# Altium PCB PCB-15_19_prototyp1.PcbDoc (part 2 of 4)
Units mm, origin at the board's own origin, x right, y up, seen from the top; angles counter-clockwise.
Board outline 190 x 150 mm, 8 copper layers (Top Layer, VCC3V3, Layer 2, layer 3, layer 4, layer 5, GND, Bottom Layer), stack 1.682 mm thick; 129 components, 396 nets, 1206 pads, 615 vias.
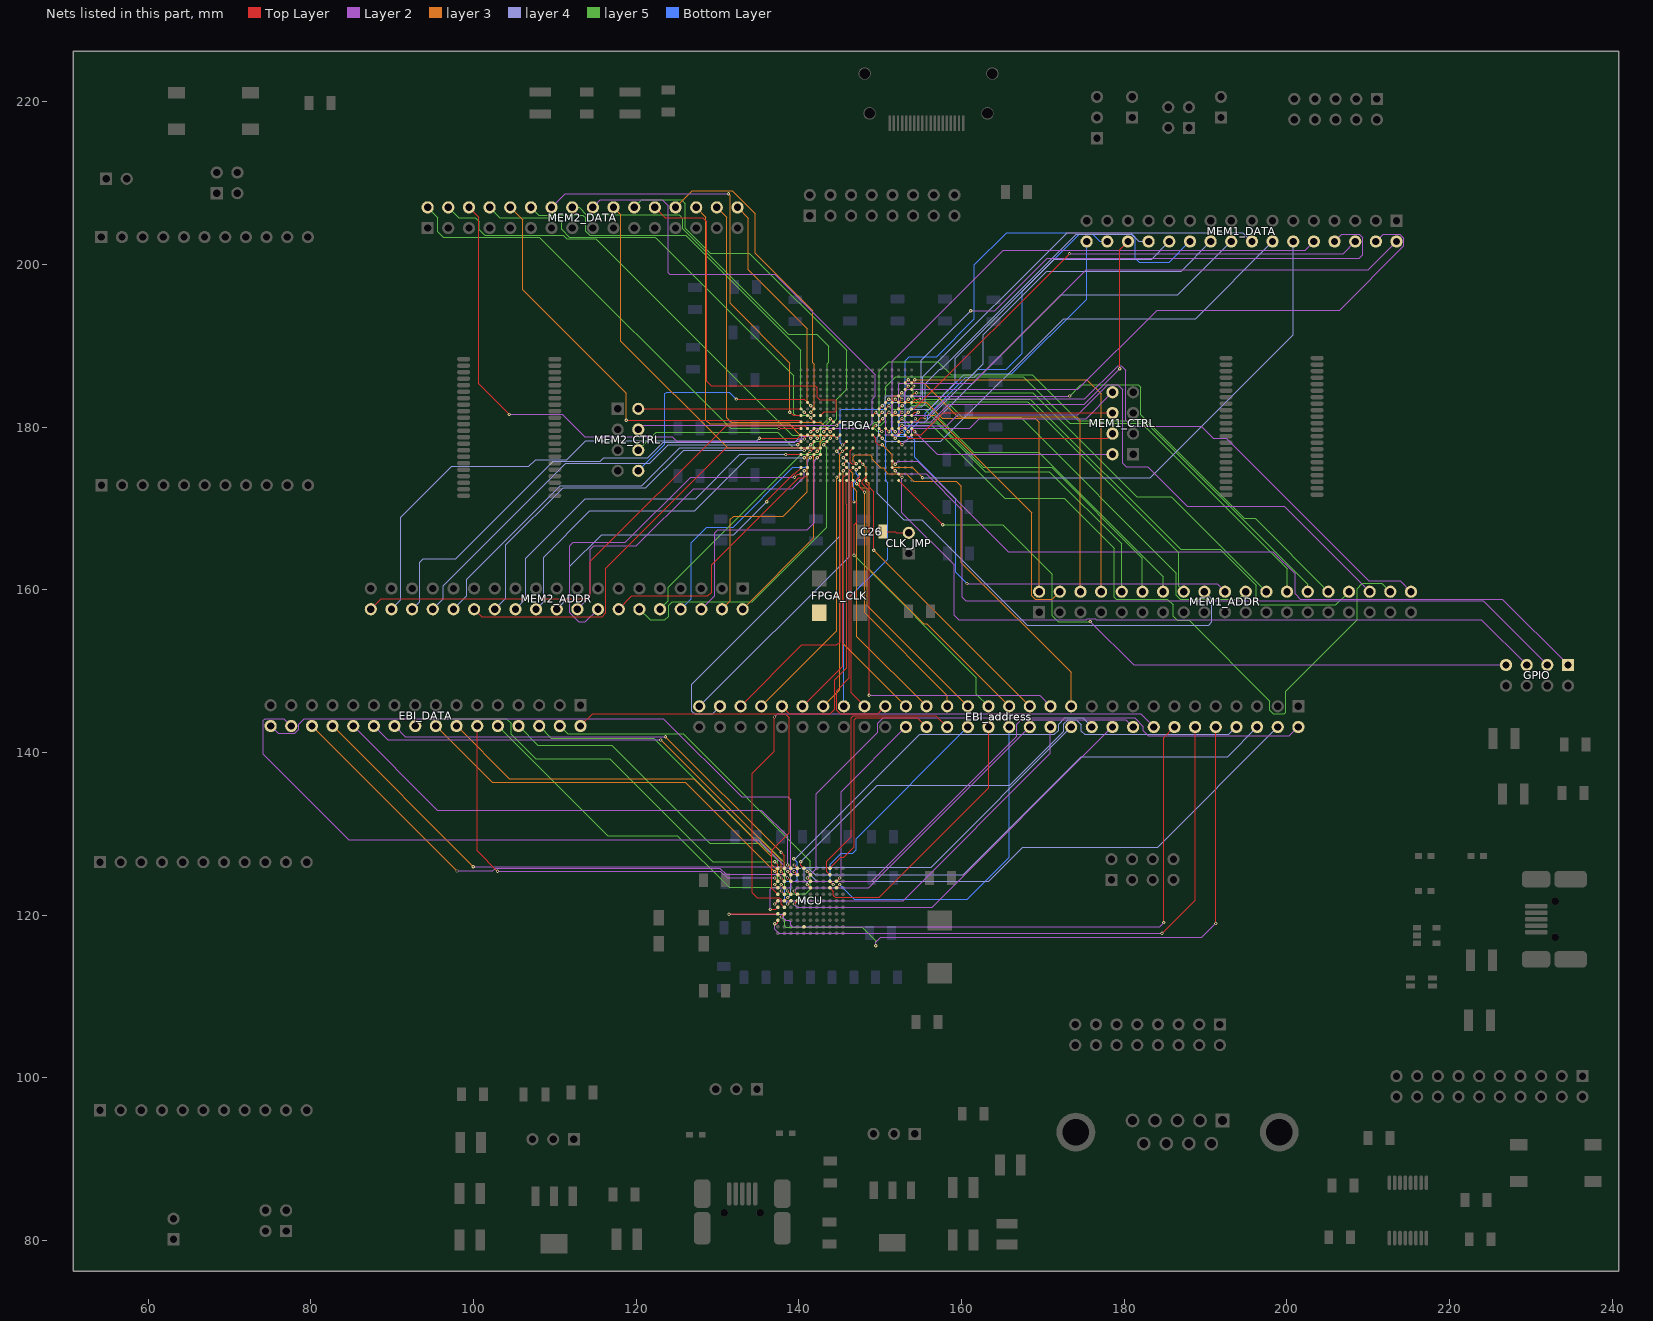
[diagram p8: the nets of this part, all layers, seen from the top]

## Via types
v1: diameter 0.4, hole 0.2, Top Layer to Bottom Layer, 599 vias
v2: diameter 0.4, hole 0.2, Top Layer to Bottom Layer, tented top, 8 vias
v3: diameter 7, hole 5, Top Layer to Bottom Layer, 4 vias
v4: diameter 1.3, hole 0.9, Top Layer to Bottom Layer, 3 vias
v5: diameter 2.1, hole 1.6, Top Layer to Bottom Layer, 1 vias

## Nets (pads, with @x,y where several pads share a name; then routed paths per layer and width w, separated by ;. In a path a pad name is that pad's centre, name@x,y a point inside that pad or via, vN(x,y) a via of type N, cw(c..) or ccw(c..) an arc to the next point about the centre after c; other vN are vias at no path point) (continued)
A10: EBI_address.40 MCU.C10 | length 22.5
  Top Layer w0.1: MCU.C10@144.629,124.154 145.034,124.559 v1(145.034,124.562)
  Layer 2 w0.1: v1(145.034,124.562) 145.187,124.715 145.187,135.154 EBI_address.40@153.162,143.129
A11: EBI_address.38 MCU.A9 | length 29.1
  Top Layer w0.1: MCU.A9@143.829,125.754 145.163,127.088 145.519,127.088 146.812,128.381 146.812,144.005 147.053,144.247 154.584,144.247 EBI_address.38@155.702,143.129
A12: EBI_address.36 MCU.B9 | length 33.2
  Top Layer w0.1: MCU.B9@143.829,124.954 143.434,125.349 143.434,126.594 146.456,129.616 146.456,144.272 146.71,144.526 156.845,144.526 EBI_address.36@158.242,143.129
A13: EBI_address.34 MCU.C9 | length 28
  Top Layer w0.1: MCU.C9@143.829,124.154 144.234,123.749 v1(144.247,123.749)
  Bottom Layer w0.1: v1(144.247,123.749) 143.866,124.13 143.866,126.238 145.237,127.61 146.66,127.61 147.066,128.016 147.066,129.413 EBI_address.34@160.782,143.129
A14: EBI_address.32 MCU.D9 | length 33.4
  Top Layer w0.1: MCU.D9@143.829,123.354 144.221,122.962 144.221,122.428 144.475,122.174 149.86,122.174 163.322,135.636 EBI_address.32@163.322,143.129
A15: EBI_address.30 MCU.D10 | length 40.3
  Top Layer w0.1: MCU.D10@144.629,123.354 v1(145.029,123.754)
  Bottom Layer w0.1: v1(145.029,123.754) 146.812,121.971 160.706,121.971 165.862,127.127 EBI_address.30@165.862,143.129
A16: EBI_address.28 MCU.E4 | length 37.9
  Top Layer w0.1: v1(139.421,122.961) MCU.E4@139.829,122.554
  Layer 2 w0.1: v1(139.421,122.961) 139.802,123.342 148.615,123.342 EBI_address.28@168.402,143.129
A17: EBI_address.26 MCU.F1 | length 45.4
  Top Layer w0.1: v1(137.033,121.361) 137.036,121.361 MCU.F1@137.429,121.754
  Layer 2 w0.1: v1(137.033,121.361) 137.439,121.768 152.832,121.768 170.942,139.878 EBI_address.26@170.942,143.129
A18: EBI_address.24 MCU.F2 | length 45.9
  Top Layer w0.1: MCU.F2@138.229,121.754 v1(138.624,122.149)
  layer 4 w0.1: v1(138.624,122.149) 139.005,122.53 139.005,125.556 139.179,125.73 140.256,125.73 140.43,125.904 156.257,125.904 EBI_address.24@173.482,143.129
A19: EBI_address.22 MCU.F3 | length 52.5
  Top Layer w0.1: v1(138.633,121.361) 138.636,121.361 MCU.F3@139.029,121.754
  layer 4 w0.1: v1(139.37,126.924) 139.573,126.924 154.864,142.215 171.425,142.215 171.958,142.748 171.958,143.485 172.72,144.247 174.904,144.247 EBI_address.22@176.022,143.129
  Bottom Layer w0.1: v1(138.633,121.361) 138.252,121.742 138.252,123.952 138.455,124.155 139.573,124.155 139.776,124.358 139.776,126.517 v1(139.37,126.924)
A20: EBI_address.20 MCU.F4 | length 49
  Top Layer w0.1: v1(139.421,121.361) 139.436,121.361 MCU.F4@139.829,121.754
  Layer 2 w0.1: v1(139.421,121.361) 139.802,120.98 156.413,120.98 EBI_address.20@178.562,143.129
A21: EBI_address.18 MCU.G1 | length 58.3
  Top Layer w0.1: v1(136.474,120.701) 137.176,120.701 MCU.G1@137.429,120.954
  Layer 2 w0.1: v1(136.474,120.701) 136.474,123.165 136.652,123.342 138.836,123.342 139.04,123.546 139.04,123.952 139.243,124.155 148.971,124.155 166.776,141.961 166.776,143.459 167.361,144.043 180.188,144.043 EBI_address.18@181.102,143.129
A22: EBI_address.16 MCU.G2 | length 75.2
  Top Layer w0.1: v1(137.008,144.348) 137.008,140.157 134.29,137.439 134.29,122.733 134.874,122.149 137.592,122.149 137.82,121.92 137.82,121.363 MCU.G2@138.229,120.954
  Layer 2 w0.1: v1(137.008,144.348) 137.414,144.755 182.016,144.755 EBI_address.16@183.642,143.129
A23: EBI_address.14 MCU.H1 | length 85.3
  Top Layer w0.1: v1(131.42,120.117) 131.457,120.154 MCU.H1@137.429,120.154 ; v1(184.861,119.075) 184.861,141.808 EBI_address.14@186.182,143.129
  Layer 2 w0.1: v1(131.42,120.117) 137.967,120.117 138.176,119.908 138.176,119.558 138.379,119.355 138.786,119.355 138.989,119.151 138.989,118.796 139.192,118.593 184.379,118.593 v1(184.861,119.075)
A24: EBI_address.12 MCU.J1 | length 76.3
  Top Layer w0.1: v1(137.033,118.948) 137.302,118.948 137.429,119.075 MCU.J1@137.429,119.354 ; v1(184.658,117.754) 188.722,121.818 EBI_address.12@188.722,143.129
  Layer 2 w0.1: v1(137.033,118.948) 137.033,118.262 137.541,117.754 v1(184.658,117.754)
A25: EBI_address.10 MCU.H2 | length 81.8
  Top Layer w0.1: v1(137.82,119.761) 137.836,119.761 MCU.H2@138.229,120.154 ; v1(191.262,118.974) EBI_address.10@191.262,143.129
  Layer 2 w0.1: v1(149.45,116.22) 149.45,116.633 150.089,117.272 189.56,117.272 v1(191.262,118.974)
  layer 5 w0.1: v1(137.82,119.761) 138.278,119.304 138.278,118.618 138.379,118.516 147.777,118.516 149.45,116.844 v1(149.45,116.22)
BACKUP.GPIO0: FPGA.R15 GPIO.1 | length 95.2
  Top Layer w0.1: FPGA.R15@151.47,175.83 v1(151.864,175.436)
  Layer 2 w0.1: v1(151.864,175.436) 152.248,175.819 154.61,175.819 165.735,164.694 198.298,164.694 201.041,161.95 201.041,159.487 201.676,158.852 226.466,158.852 GPIO.1@234.569,150.749
BACKUP.GPIO1: FPGA.T15 GPIO.3 | length 96.9
  Top Layer w0.1: FPGA.T15@151.47,175.03 151.867,174.633 v1(151.867,174.625)
  Layer 2 w0.1: v1(151.867,174.625) 152.248,174.244 155.651,174.244 160.122,169.774 160.122,159.055 160.528,158.648 224.13,158.648 GPIO.3@232.029,150.749
BACKUP.GPIO2: FPGA.U16 GPIO.5 | length 93.2
  Top Layer w0.1: FPGA.U16@152.27,174.23 152.662,173.838 v1(152.679,173.838)
  Layer 2 w0.1: v1(152.679,173.838) 152.679,169.494 159.08,163.093 159.08,156.87 159.639,156.312 175.347,156.312 175.469,156.433 176.454,156.433 176.575,156.312 223.926,156.312 GPIO.5@229.489,150.749
BACKUP.GPIO3: FPGA.V16 GPIO.7 | length 87
  Top Layer w0.1: FPGA.V16@152.27,173.43 v1(157.704,167.996)
  Layer 2 w0.1: v1(175.819,156.083) 181.153,150.749 GPIO.7@226.949,150.749
  layer 5 w0.1: v1(157.704,167.996) 165.075,167.996 171.171,161.9 171.171,156.82 171.907,156.083 v1(175.819,156.083)
CLK: C26.2 CLK_JMP.2 | length 3.3
  Top Layer w0.1: C26.2@150.321,167.148 151.841,167.148 151.99,166.999 CLK_JMP.2@153.524,166.999
CS0: EBI_address.6 MCU.D6 | length 66.1
  Top Layer w0.1: v1(141.021,123.749) 141.034,123.749 MCU.D6@141.429,123.354
  layer 4 w0.1: v1(141.021,123.749) 141.021,123.98 140.665,124.336 140.665,125.578 140.787,125.699 141.249,125.699 142.006,124.943 160.198,124.943 174.752,139.497 192.71,139.497 EBI_address.6@196.342,143.129
CS1: EBI_address.8 MCU.A5 | length 63.9
  Top Layer w0.1: v1(140.233,126.556) 140.233,126.15 MCU.A5@140.629,125.754
  layer 4 w0.1: v1(140.233,126.556) 149.644,135.966 165.938,135.966 172.582,142.61 172.582,143.502 173.109,144.029 174.106,144.029 174.752,143.383 174.752,142.621 175.158,142.215 192.888,142.215 EBI_address.8@193.802,143.129
DATA0: EBI_DATA.32 MCU.B4 | length 79.2
  Top Layer w0.1: v1(139.421,125.362) MCU.B4@139.829,124.954
  Layer 2 w0.1: EBI_DATA.32@75.057,143.256 75.971,142.342 78.029,142.342 78.511,142.824 78.511,143.459 79.223,144.17 123.342,144.17 132.969,134.544 138.633,134.544 139.02,134.157 139.02,125.763 v1(139.421,125.362)
DATA0.ADDR0: FPGA.F15 MEM1_ADDR.2 | length 40.3
  Top Layer w0.1: FPGA.F15@151.47,183.03 151.867,183.427 v1(151.867,183.439)
  layer 3 w0.1: v1(151.867,183.439) 152.273,183.032 155.677,183.032 157.632,181.077 169.062,181.077 169.545,180.594 MEM1_ADDR.2@169.545,159.766
DATA0.ADDR1: FPGA.F16 MEM1_ADDR.4 | length 40.4
  Top Layer w0.1: FPGA.F16@152.27,183.03 v1(152.679,183.439)
  layer 3 w0.1: v1(152.679,183.439) 152.273,183.845 151.663,183.845 151.511,183.693 151.511,181.661 151.74,181.432 155.327,181.432 155.375,181.48 156.619,181.48 168.631,169.469 168.631,159.283 169.062,158.852 171.171,158.852 MEM1_ADDR.4@172.085,159.766
DATA0.ADDR2: FPGA.C17 MEM1_ADDR.6 | length 44.9
  Top Layer w0.1: FPGA.C17@153.07,185.43 v1(153.467,185.826)
  layer 3 w0.1: v1(153.467,185.826) 153.873,185.42 155.372,185.42 159.512,181.28 174.193,181.28 174.625,180.848 MEM1_ADDR.6@174.625,159.766
DATA0.ADDR3: FPGA.C18 MEM1_ADDR.8 | length 48.5
  Top Layer w0.1: FPGA.C18@153.87,185.43 v1(154.266,185.826)
  layer 3 w0.1: v1(154.266,185.826) 175.412,185.826 177.165,184.074 MEM1_ADDR.8@177.165,159.766
DATA0.ADDR4: FPGA.F14 MEM1_ADDR.10 | length 46.5
  Top Layer w0.1: FPGA.F14@150.67,183.03 v1(151.053,183.413)
  layer 5 w0.1: v1(154.33,181.051) 154.838,180.543 156.87,180.543 162.89,174.523 170.815,174.523 179.705,165.633 MEM1_ADDR.10@179.705,159.766
  Bottom Layer w0.1: v1(151.053,183.413) 151.206,183.413 151.536,183.083 152.121,183.083 152.324,182.88 152.324,179.222 152.445,179.101 152.914,179.101 153.035,179.222 153.035,179.502 154.33,180.797 v1(154.33,181.051)
DATA0.ADDR5: FPGA.G14 MEM1_ADDR.12 | length 43.6
  Top Layer w0.1: FPGA.G14@150.67,182.23 151.066,182.626 v1(151.079,182.626)
  layer 5 w0.1: v1(151.079,182.626) 151.486,182.22 155.499,182.22 162.662,175.057 171.069,175.057 182.245,163.881 MEM1_ADDR.12@182.245,159.766
DATA0.ADDR6: FPGA.D17 MEM1_ADDR.14 | length 47.3
  Top Layer w0.1: FPGA.D17@153.07,184.63 153.467,185.027 v1(153.467,185.039)
  layer 5 w0.1: v1(153.467,185.039) 153.111,185.395 152.4,185.395 152.298,185.293 152.298,183.286 152.552,183.032 153.568,183.032 153.914,182.686 155.693,182.686 161.493,176.886 169.523,176.886 184.785,161.624 MEM1_ADDR.14@184.785,159.766
DATA0.ADDR7: FPGA.D18 MEM1_ADDR.16 | length 47.5
  Top Layer w0.1: FPGA.D18@153.87,184.63 153.87,184.81 154.099,185.039 v1(154.153,185.039)
  layer 5 w0.1: v1(154.153,185.039) 154.076,184.963 154.076,183.644 154.635,183.086 168.146,183.086 186.69,164.541 186.69,160.401 MEM1_ADDR.16@187.325,159.766
DATA0.ADDR8: FPGA.H12 MEM1_ADDR.18 | length 62.9
  Top Layer w0.1: FPGA.H12@149.07,181.43 v1(149.479,181.839)
  layer 4 w0.1: v1(149.479,181.839) 149.835,181.483 149.835,178.943 149.65,178.758 149.65,171.863 152.908,168.605 155.143,168.605 168.097,155.651 190.373,155.651 190.779,156.058 190.779,158.852 MEM1_ADDR.18@189.865,159.766
DATA0.ADDR9: FPGA.G13 MEM1_ADDR.20 | length 61.2
  Top Layer w0.1: FPGA.G13@149.87,182.23 v1(150.266,182.626)
  Layer 2 w0.1: v1(160.68,160.757) 191.414,160.757 MEM1_ADDR.20@192.405,159.766
  Bottom Layer w0.1: v1(150.266,182.626) 150.622,182.982 151.333,182.982 151.435,182.88 151.435,179.222 151.638,179.019 152.011,179.019 152.129,178.901 153.737,178.901 154.229,178.41 154.229,176.276 159.309,171.196 159.309,162.128 v1(160.68,160.757)
DATA0.ADDR10: FPGA.E16 MEM1_ADDR.22 | length 55.4
  Top Layer w0.1: FPGA.E16@152.27,183.83 v1(152.66,184.22)
  layer 5 w0.1: v1(152.66,184.22) 153.086,183.794 153.695,183.794 154.133,183.185 154.432,182.886 158.414,182.886 160.122,181.178 167.284,181.178 186.411,162.052 186.411,159.309 186.893,158.826 194.005,158.826 MEM1_ADDR.22@194.945,159.766
DATA0.ADDR11: FPGA.E18 MEM1_ADDR.24 | length 53.9
  Top Layer w0.1: FPGA.E18@153.87,183.83 154.266,184.226 v1(154.469,184.226)
  layer 5 w0.1: v1(154.469,184.226) 168.783,184.226 181.559,171.45 185.801,171.45 MEM1_ADDR.24@197.485,159.766
DATA0.ADDR12: FPGA.K12 MEM1_ADDR.26 | length 68.6
  Top Layer w0.1: FPGA.K12@149.07,179.83 v1(149.479,180.238)
  layer 5 w0.1: v1(149.479,180.238) 150.089,180.238 150.698,180.848 150.698,184.988 151.892,186.182 167.589,186.182 173.304,180.467 182.143,180.467 200.025,162.585 MEM1_ADDR.26@200.025,159.766
DATA0.ADDR13: FPGA.K13 MEM1_ADDR.28 | length 74.6
  Top Layer w0.1: FPGA.K13@149.87,179.83 150.206,179.494 v1(150.206,179.462)
  layer 5 w0.1: v1(150.206,179.462) 149.671,179.462 149.129,180.004 149.129,180.396 149.352,180.619 149.657,180.619 149.885,180.848 149.885,186.868 151.079,188.062 157.099,188.062 158.725,186.436 168.707,186.436 174.371,180.772 182.499,180.772 202.565,160.706 MEM1_ADDR.28@202.565,159.766
DATA0.ADDR14: FPGA.F17 MEM1_ADDR.30 | length 65.4
  Top Layer w0.1: FPGA.F17@153.07,183.03 v1(153.467,183.427)
  Layer 2 w0.1: v1(153.467,183.427) 153.86,183.82 v1(173.304,183.82)
  layer 5 w0.1: v1(173.304,183.82) 174.676,185.191 181.737,185.191 182.016,184.912 182.016,181.538 194.772,168.783 196.088,168.783 MEM1_ADDR.30@205.105,159.766
DATA0.ADDR15: FPGA.F18 MEM1_ADDR.32 | length 66.2
  Top Layer w0.1: FPGA.F18@153.87,183.03 154.279,183.439 v1(154.889,183.439)
  layer 5 w0.1: v1(154.889,183.439) 168.478,183.439 186.944,164.973 191.821,164.973 196.215,160.579 196.215,158.623 196.698,158.14 206.019,158.14 MEM1_ADDR.32@207.645,159.766
DATA0.ADDR16: FPGA.H13 MEM1_ADDR.34 | length 81.5
  Top Layer w0.1: FPGA.H13@149.87,181.43 150.266,181.826 v1(150.266,181.839)
  Layer 2 w0.1: v1(150.266,181.839) 150.673,181.432 150.673,179.146 150.774,179.045 151.994,179.045 152.273,179.324 152.273,179.629 152.502,179.857 152.806,179.857 153.137,180.188 158.217,180.188 159.563,181.534 174.295,181.534 177.952,185.191 179.222,185.191 179.832,184.582 179.832,175.565 180.264,175.133 182.88,175.133 187.757,170.256 199.695,170.256 MEM1_ADDR.34@210.185,159.766
DATA0.ADDR17: FPGA.H14 MEM1_ADDR.36 | length 93.7
  Top Layer w0.1: FPGA.H14@150.67,181.43 v1(151.079,181.839)
  layer 5 w0.1: v1(151.079,181.839) 151.435,181.483 152.806,181.483 153.035,181.254 153.035,180.823 153.619,180.238 156.362,180.238 165.329,171.272 172.607,171.272 178.805,165.075 178.805,159.066 179.019,158.852 185.318,158.852 186.004,158.166 186.004,156.769 186.538,156.235 187.978,156.235 197.917,146.297 197.917,145.161 198.309,144.769 199.709,144.769 199.873,144.932 199.873,147.549 208.636,156.312 208.636,160.147 209.296,160.807 211.684,160.807 MEM1_ADDR.36@212.725,159.766
DATA0.ADDR18: FPGA.H15 MEM1_ADDR.38 | length 81.7
  Top Layer w0.1: FPGA.H15@151.47,181.43 151.867,181.827 v1(151.867,181.839)
  Layer 2 w0.1: v1(151.867,181.839) 152.222,181.483 156.058,181.483 158.039,183.464 175.184,183.464 179.248,187.528 179.629,187.528 180.188,186.969 180.188,180.848 180.924,180.111 189.484,180.111 190.983,178.613 192.557,178.613 210.058,161.112 213.919,161.112 MEM1_ADDR.38@215.265,159.766
DATA0.BUS0: FPGA.H16 MEM1_DATA.2 | length 72.6
  Top Layer w0.1: FPGA.H16@152.27,181.43 v1(152.679,181.839)
  Layer 2 w0.1: v1(152.679,181.839) 152.298,182.22 152.298,185.293 152.4,185.395 161.392,185.395 175.336,199.339 210.007,199.339 MEM1_DATA.2@213.487,202.819
DATA0.BUS1: FPGA.G16 MEM1_DATA.4 | length 76.2
  Top Layer w0.1: FPGA.G16@152.27,182.23 152.666,182.626 v1(152.73,182.626)
  Layer 2 w0.1: v1(152.73,182.626) 153.035,182.931 153.035,184.302 153.365,184.633 174.295,184.633 184.048,194.386 206.477,194.386 214.401,202.311 214.401,203.2 213.868,203.733 211.861,203.733 MEM1_DATA.4@210.947,202.819
DATA0.BUS2: FPGA.G18 MEM1_DATA.6 | length 63.1
  Top Layer w0.1: FPGA.G18@153.87,182.23 154.183,182.23 v1(173.28,201.327)
  Layer 2 w0.1: v1(173.28,201.327) 206.915,201.327 MEM1_DATA.6@208.407,202.819
DATA0.BUS3: FPGA.J13 MEM1_DATA.8 | length 78
  Top Layer w0.1: FPGA.J13@149.87,180.63 150.266,181.026 v1(150.317,181.026)
  Layer 2 w0.1: v1(161.138,194.31) 164.109,194.31 170.561,200.762 208.915,200.762 209.321,201.168 209.321,203.302 208.89,203.733 206.781,203.733 MEM1_DATA.8@205.867,202.819
  layer 4 w0.1: v1(150.317,181.026) 150.622,181.331 150.622,183.693 150.764,183.835 154.893,183.835 155.042,183.983 155.042,188.214 v1(161.138,194.31)
DATA0.BUS4: FPGA.K14 MEM1_DATA.10 | length 67.3
  Top Layer w0.1: FPGA.K14@150.67,179.83 v1(151.074,179.426)
  Layer 2 w0.1: v1(151.074,179.426) 151.511,179.862 151.511,188.087 165.151,201.727 202.235,201.727 MEM1_DATA.10@203.327,202.819
DATA0.BUS5: FPGA.L12 MEM1_DATA.12 | length 73.8
  Top Layer w0.1: FPGA.L12@149.07,179.03 149.479,178.621 149.479,178.105 149.758,177.825 v1(150.266,177.825)
  layer 3 w0.1: v1(150.266,177.825) 151.511,176.581 151.511,175.158 151.638,175.031 153.949,175.031 v1(155.219,173.761)
  layer 4 w0.1: v1(155.219,173.761) 183.185,173.761 200.787,191.364 MEM1_DATA.12@200.787,202.819
DATA0.BUS6: FPGA.L13 MEM1_DATA.14 | length 58.8
  Top Layer w0.1: FPGA.L13@149.87,179.03 v1(150.262,178.638)
  layer 4 w0.1: v1(150.262,178.638) 150.617,178.283 157.48,178.283 172.542,193.345 188.773,193.345 MEM1_DATA.14@198.247,202.819
DATA0.BUS7: FPGA.K15 MEM1_DATA.16 | length 59.3
  Top Layer w0.1: FPGA.K15@151.47,179.83 151.47,179.629 v1(151.867,179.426)
  layer 4 w0.1: v1(151.867,179.426) 151.511,179.781 151.511,182.88 151.663,183.032 155.042,183.032 155.245,183.236 155.245,186.17 172.994,203.919 194.607,203.919 MEM1_DATA.16@195.707,202.819
DATA0.BUS8: FPGA.K16 MEM1_DATA.18 | length 50.4
  Top Layer w0.1: FPGA.K16@152.27,179.83 v1(152.678,180.238)
  layer 4 w0.1: v1(152.678,180.238) 156.235,180.238 172.263,196.266 186.614,196.266 MEM1_DATA.18@193.167,202.819
DATA0.BUS9: FPGA.L15 MEM1_DATA.20 | length 52.3
  Top Layer w0.1: FPGA.L15@151.47,179.03 v1(151.867,178.633)
  layer 4 w0.1: v1(151.867,178.633) 152.298,179.065 152.298,180.518 152.4,180.619 155.504,180.619 162.687,187.802 162.687,191.364 170.51,199.187 186.995,199.187 MEM1_DATA.20@190.627,202.819
DATA0.BUS10: FPGA.L16 MEM1_DATA.22 | length 59.1
  Top Layer w0.1: FPGA.L16@152.27,179.03 152.27,179.248 152.476,179.248 v1(152.679,179.451)
  Bottom Layer w0.1: v1(152.679,179.451) 153.086,179.857 153.086,188.163 153.568,188.646 156.947,188.646 161.595,193.294 161.595,199.949 165.565,203.919 180.815,203.919 181.381,203.352 181.381,200.762 181.864,200.279 185.547,200.279 MEM1_DATA.22@188.087,202.819
DATA0.BUS11: FPGA.H17 MEM1_DATA.24 | length 43.1
  Top Layer w0.1: FPGA.H17@153.07,181.43 153.467,181.827 v1(153.467,181.839)
  layer 4 w0.1: v1(153.467,181.839) 153.529,181.839 153.91,182.22 156.032,182.22 159.233,185.42 159.233,188.468 171.425,200.66 183.388,200.66 MEM1_DATA.24@185.547,202.819
DATA0.BUS12: FPGA.H18 MEM1_DATA.26 | length 44
  Top Layer w0.1: FPGA.H18@153.87,181.43 154.279,181.839 v1(154.686,181.839)
  layer 4 w0.1: v1(154.686,181.839) 154.33,181.483 153.213,181.483 153.111,181.585 153.111,182.143 153.213,182.245 153.594,182.245 153.822,182.474 155.143,182.474 155.55,182.88 155.55,185.346 157.336,187.132 157.535,187.132 174.122,203.719 180.888,203.719 181.788,202.819 MEM1_DATA.26@183.007,202.819
DATA0.BUS13: FPGA.J16 MEM1_DATA.28 | length 46.3
  Top Layer w0.1: FPGA.J16@152.27,180.63 152.666,181.026 v1(152.679,181.026) ; v1(179.451,187.173) 179.451,201.803 MEM1_DATA.28@180.467,202.819
  Layer 2 w0.1: v1(152.679,181.026) 153.06,180.645 156.261,180.645 158.445,182.829 175.108,182.829 v1(179.451,187.173)
DATA0.BUS14: FPGA.J18 MEM1_DATA.30 | length 38.8
  Top Layer w0.1: FPGA.J18@153.87,180.63 154.48,180.63 154.98,181.13 v1(155.52,181.13)
  Bottom Layer w0.1: v1(155.52,181.13) 155.52,181.67 160.286,186.436 161.366,186.436 162.027,187.096 165.506,187.096 167.488,189.078 167.488,196.709 174.498,203.719 176.113,203.719 177.013,202.819 MEM1_DATA.30@177.927,202.819
DATA0.BUS15: FPGA.K17 MEM1_DATA.32 | length 36.6
  Top Layer w0.1: FPGA.K17@153.07,179.83 153.467,179.433 v1(153.467,179.426)
  Bottom Layer w0.1: v1(153.467,179.426) 154.658,180.617 155.502,180.617 155.87,180.985 155.87,181.465 160.536,186.131 161.595,186.131 162.001,186.538 166.192,186.538 175.387,195.732 MEM1_DATA.32@175.387,202.819
DATA0.ENABLE: FPGA.M16 MEM1_CTRL.8 | length 29.5
  Top Layer w0.1: FPGA.M16@152.27,178.23 152.67,177.83 v1(152.679,177.83)
  Layer 2 w0.1: v1(152.679,177.83) 153.873,179.024 153.873,179.629 154.076,179.832 160.985,179.832 162.179,181.026 175.311,181.026 MEM1_CTRL.8@178.562,184.277
DATA0.LB: FPGA.L17 MEM1_CTRL.4 | length 25.9
  Top Layer w0.1: FPGA.L17@153.07,179.03 153.462,178.638 178.003,178.638 MEM1_CTRL.4@178.562,179.197
DATA0.UB: FPGA.K18 MEM1_CTRL.2 | length 26
  Top Layer w0.1: FPGA.K18@153.87,179.83 v1(154.274,179.426)
  Layer 2 w0.1: v1(154.274,179.426) 157.043,176.657 MEM1_CTRL.2@178.562,176.657
DATA0.WRITE: FPGA.L18 MEM1_CTRL.6 | length 25.8
  Top Layer w0.1: FPGA.L18@153.87,179.03 155.042,179.03 157.749,181.737 MEM1_CTRL.6@178.562,181.737
DATA1: EBI_DATA.30 MCU.A4 | length 81.9
  Top Layer w0.1: v1(139.421,126.162) MCU.A4@139.829,125.754
  Layer 2 w0.1: EBI_DATA.30@77.597,143.256 76.683,144.17 74.371,144.17 74.143,143.942 74.143,139.751 84.658,129.235 135.032,129.235 138.455,125.812 138.671,125.812 138.983,125.499 138.983,125.202 139.192,124.993 139.598,124.993 139.878,125.273 139.878,125.705 v1(139.421,126.162)
DATA1.ADDR0: FPGA.N4 MEM2_ADDR.2 | length 23.8
  Top Layer w0.1: v1(142.265,177.038) 142.278,177.038 FPGA.N4@142.67,177.43
  layer 3 w0.1: MEM2_ADDR.2@133.096,157.607 141.859,166.37 141.859,176.632 v1(142.265,177.038)
DATA1.ADDR1: FPGA.N3 MEM2_ADDR.4 | length 28.1
  Top Layer w0.1: v1(141.376,177.038) 141.478,177.038 FPGA.N3@141.87,177.43
  layer 3 w0.1: MEM2_ADDR.4@130.556,157.607 131.572,158.623 131.572,168.656 131.978,169.062 138.074,169.062 141.046,172.034 141.046,176.708 v1(141.376,177.038)
DATA1.ADDR2: FPGA.P4 MEM2_ADDR.6 | length 31.5
  Top Layer w0.1: v1(142.265,176.225) FPGA.P4@142.67,176.63
  Layer 2 w0.1: MEM2_ADDR.6@128.016,157.607 129.642,159.233 129.642,166.98 130.048,167.386 141.046,167.386 141.91,168.25 141.91,175.87 v1(142.265,176.225)
DATA1.ADDR3: FPGA.P3 MEM2_ADDR.8 | length 28.7
  Top Layer w0.1: v1(141.407,176.23) 141.47,176.23 FPGA.P3@141.87,176.63
  Bottom Layer w0.1: MEM2_ADDR.8@125.476,157.607 126.746,158.877 126.746,165.786 128.665,167.704 131.916,167.704 139.243,175.031 140.818,175.031 141.072,175.285 141.072,175.895 v1(141.407,176.23)
DATA1.ADDR4: FPGA.L6 MEM2_ADDR.10 | length 31.8
  Top Layer w0.1: v1(143.866,178.638) 143.878,178.638 FPGA.L6@144.27,179.03
  layer 5 w0.1: MEM2_ADDR.10@122.936,157.607 123.952,158.623 123.952,160.325 140.31,176.682 142.443,176.682 142.672,176.911 142.672,178.003 142.951,178.283 143.51,178.283 v1(143.866,178.638)
DATA1.ADDR5: FPGA.M5 MEM2_ADDR.12 | length 39.9
  Top Layer w0.1: v1(143.078,177.825) 143.078,177.838 FPGA.M5@143.47,178.23
  layer 5 w0.1: MEM2_ADDR.12@120.396,157.607 121.717,156.286 123.546,156.286 123.977,156.718 123.977,158.064 124.435,158.521 134.264,158.521 143.434,167.691 143.434,177.47 v1(143.078,177.825)
DATA1.ADDR6: FPGA.U2 MEM2_ADDR.14 | length 32.1
  Top Layer w0.1: MEM2_ADDR.14@117.856,157.607 119.482,159.233 128.829,159.233 129.286,159.69 129.286,163.068 139.979,173.761 140.601,173.761 FPGA.U2@141.07,174.23
DATA1.ADDR7: FPGA.U1 MEM2_ADDR.16 | length 44.9
  Top Layer w0.1: v1(139.471,173.838) 139.864,174.23 FPGA.U1@140.27,174.23
  Layer 2 w0.1: MEM2_ADDR.16@115.316,157.607 113.767,156.058 112.954,156.058 111.862,157.15 111.862,165.405 112.268,165.811 118.669,165.811 126.695,173.838 v1(139.471,173.838)
DATA1.ADDR8: FPGA.T2 MEM2_ADDR.18 | length 39.3
  Top Layer w0.1: v1(140.665,174.625) FPGA.T2@141.07,175.03
  Layer 2 w0.1: MEM2_ADDR.18@112.776,157.607 114.351,159.182 114.351,164.998 114.757,165.405 120.04,165.405 127.051,172.415 139.192,172.415 140.665,173.888 v1(140.665,174.625)
DATA1.ADDR9: FPGA.T1 MEM2_ADDR.20 | length 39.5
  Top Layer w0.1: v1(136.055,170.815) 136.055,170.94 139.354,174.239 139.479,174.239 FPGA.T1@140.27,175.03
  layer 4 w0.1: MEM2_ADDR.20@110.236,157.607 111.862,159.233 111.862,162.89 115.748,166.776 132.016,166.776 v1(136.055,170.815)
DATA1.ADDR10: FPGA.P2 MEM2_ADDR.22 | length 44.5
  Top Layer w0.1: v1(140.665,176.225) FPGA.P2@141.07,176.63
  layer 4 w0.1: MEM2_ADDR.22@107.696,157.607 108.61,158.521 108.61,164.008 114.325,169.723 127.203,169.723 133.706,176.225 v1(140.665,176.225)
DATA1.ADDR11: FPGA.P1 MEM2_ADDR.24 | length 45.9
  Top Layer w0.1: v1(138.403,176.63) FPGA.P1@140.27,176.63
  layer 4 w0.1: MEM2_ADDR.24@105.156,157.607 106.426,158.877 106.426,163.881 113.741,171.196 127.305,171.196 132.739,176.63 v1(138.403,176.63)
DATA1.ADDR12: FPGA.N2 MEM2_ADDR.26 | length 50.6
  Top Layer w0.1: v1(140.665,177.114) 140.754,177.114 FPGA.N2@141.07,177.43
  layer 4 w0.1: MEM2_ADDR.26@102.616,157.607 103.962,158.953 103.962,165.506 111.023,172.568 121.209,172.568 125.821,177.18 140.599,177.18 v1(140.665,177.114)
DATA1.ADDR13: FPGA.N1 MEM2_ADDR.28 | length 52.4
  Top Layer w0.1: MEM2_ADDR.28@100.076,157.607 100.99,156.693 115.824,156.693 116.281,157.15 116.281,162.662 131.05,177.43 FPGA.N1@140.27,177.43
DATA1.ADDR14: FPGA.M3 MEM2_ADDR.30 | length 54.1
  Top Layer w0.1: v1(141.478,177.838) FPGA.M3@141.87,178.23
  layer 4 w0.1: MEM2_ADDR.30@97.536,157.607 99.162,159.233 99.162,161.265 110.693,172.796 120.675,172.796 125.349,177.47 141.11,177.47 v1(141.478,177.838)
DATA1.ADDR15: FPGA.M1 MEM2_ADDR.32 | length 54.8
  Top Layer w0.1: v1(139.878,177.825) 139.878,177.838 FPGA.M1@140.27,178.23
  layer 4 w0.1: MEM2_ADDR.32@94.996,157.607 96.266,158.877 96.266,160.475 111.354,175.562 121.689,175.562 123.952,177.825 v1(139.878,177.825)
DATA1.ADDR16: FPGA.L2 MEM2_ADDR.34 | length 60.4
  Top Layer w0.1: v1(140.665,178.537) 140.665,178.625 FPGA.L2@141.07,179.03
  layer 4 w0.1: MEM2_ADDR.34@92.456,157.607 93.37,158.521 93.37,163.373 93.802,163.805 97.79,163.805 109.779,175.793 115.595,175.793 116.002,176.2 121.412,176.2 123.338,178.126 139.493,178.126 139.903,178.537 v1(140.665,178.537)
DATA1.ADDR17: FPGA.L1 MEM2_ADDR.36 | length 65.2
  Top Layer w0.1: v1(135.153,178.638) 139.878,178.638 FPGA.L1@140.27,179.03
  layer 4 w0.1: MEM2_ADDR.36@89.916,157.607 91.084,158.775 91.084,168.91 97.333,175.158 106.807,175.158 107.645,175.997 111.481,175.997 113.81,178.326 134.841,178.326 v1(135.153,178.638)
DATA1.ADDR18: FPGA.K2 MEM2_ADDR.38 | length 65.6
  Top Layer w0.1: MEM2_ADDR.38@87.376,157.607 88.646,158.877 113.919,158.877 114.351,159.309 114.351,163.474 131.064,180.188 140.712,180.188 FPGA.K2@141.07,179.83
DATA1.BUS0: FPGA.K1 MEM2_DATA.2 | length 58.2
  Top Layer w0.1: v1(137.566,179.83) FPGA.K1@140.27,179.83
  layer 5 w0.1: MEM2_DATA.2@94.361,207.01 95.631,205.74 95.631,204.013 96.274,203.37 108.101,203.37 131.641,179.83 v1(137.566,179.83)
DATA1.BUS1: FPGA.L4 MEM2_DATA.4 | length 58.2
  Top Layer w0.1: v1(142.278,178.638) FPGA.L4@142.67,179.03
  layer 5 w0.1: MEM2_DATA.4@96.901,207.01 98.171,205.74 100.203,205.74 100.711,205.232 100.711,204.267 101.408,203.57 111.041,203.57 111.441,203.17 115.04,203.17 139.191,179.019 141.897,179.019 v1(142.278,178.638)
DATA1.BUS2: FPGA.L3 MEM2_DATA.6 | length 67
  Top Layer w0.1: MEM2_DATA.6@99.441,207.01 100.654,205.797 100.654,185.299 v1(104.394,181.559) ; v1(141.478,178.638) FPGA.L3@141.87,179.03
  Layer 2 w0.1: v1(104.394,181.559) 110.922,181.559 113.69,178.791 124.435,178.791 124.993,178.232 140.005,178.232 140.284,178.511 140.411,178.892 141.224,178.892 v1(141.478,178.638)
DATA1.BUS3: FPGA.J3 MEM2_DATA.8 | length 54.2
  Top Layer w0.1: v1(141.478,181.153) 141.478,181.022 FPGA.J3@141.87,180.63
  layer 5 w0.1: MEM2_DATA.8@101.981,207.01 103.251,205.74 110.323,205.74 110.831,205.232 110.831,204.332 111.793,203.37 122.36,203.37 139.395,186.334 139.395,181.635 139.598,181.432 141.199,181.432 v1(141.478,181.153)
DATA1.BUS4: FPGA.J1 MEM2_DATA.10 | length 53.7
  Top Layer w0.1: v1(118.774,180.845) 140.055,180.845 FPGA.J1@140.27,180.63
  layer 3 w0.1: MEM2_DATA.10@104.521,207.01 106.045,205.486 106.045,196.875 118.774,184.146 v1(118.774,180.845)
DATA1.BUS5: FPGA.H2 MEM2_DATA.12 | length 49.8
  Top Layer w0.1: v1(140.665,181.839) 140.665,181.835 FPGA.H2@141.07,181.43
  layer 5 w0.1: MEM2_DATA.12@107.061,207.01 108.001,206.07 113.451,206.07 113.781,205.74 113.781,204.097 114.308,203.57 126.111,203.57 140.259,189.422 140.259,182.245 v1(140.665,181.839)
DATA1.BUS6: FPGA.H1 MEM2_DATA.14 | length 54
  Top Layer w0.1: v1(138.887,181.839) 139.296,181.43 FPGA.H1@140.27,181.43
  Layer 2 w0.1: MEM2_DATA.14@109.601,207.01 111.277,208.686 v1(131.343,208.686)
  layer 3 w0.1: v1(131.343,208.686) 131.547,208.483 131.547,195.199 138.887,187.858 v1(138.887,181.839)
DATA1.BUS7: FPGA.K4 MEM2_DATA.16 | length 51
  Top Layer w0.1: v1(142.266,179.478) 142.318,179.478 FPGA.K4@142.67,179.83
  layer 5 w0.1: MEM2_DATA.16@112.141,207.01 112.979,207.01 113.894,206.096 125.298,206.096 125.755,205.638 125.755,204.394 138.709,191.44 142.215,191.44 143.708,189.947 143.708,187.989 143.51,187.791 143.51,180.879 142.266,179.635 v1(142.266,179.478)
DATA1.BUS8: FPGA.K3 MEM2_DATA.18 | length 63.6
  Top Layer w0.1: v1(141.478,179.426) 141.681,179.629 141.87,179.629 FPGA.K3@141.87,179.83
  Layer 2 w0.1: MEM2_DATA.18@114.681,207.01 115.595,207.924 123.215,207.924 123.927,207.213 123.927,198.984 124.116,198.794 137.059,198.794 149.416,186.438 149.416,183.791 149.022,183.397 149.022,180.442 148.412,179.832 141.884,179.832 v1(141.478,179.426)
DATA1.BUS9: FPGA.L5 MEM2_DATA.20 | length 48.6
  Top Layer w0.1: v1(143.078,178.638) FPGA.L5@143.47,179.03
  layer 3 w0.1: MEM2_DATA.20@117.221,207.01 118.135,206.096 118.135,190.574 131.239,177.47 142.494,177.47 142.621,177.597 142.621,178.181 v1(143.078,178.638)
DATA1.BUS10: FPGA.K5 MEM2_DATA.22 | length 47.7
  Top Layer w0.1: v1(143.078,179.426) 143.078,179.438 FPGA.K5@143.47,179.83
  layer 5 w0.1: MEM2_DATA.22@119.761,207.01 120.675,207.924 125.578,207.924 126.035,207.467 126.035,204.419 129.083,201.371 133.934,201.371 145.872,189.433 145.872,184.633 144.678,183.439 144.678,181.026 v1(143.078,179.426)
DATA1.BUS11: FPGA.H4 MEM2_DATA.24 | length 47.7
  Top Layer w0.1: MEM2_DATA.24@122.301,207.01 123.571,205.74 128.168,205.74 128.676,205.232 128.676,185.649 129.235,185.09 142.037,185.09 142.265,184.861 142.265,183.693 142.596,183.363 144.475,183.363 144.602,183.236 144.602,182.016 144.475,181.889 143.129,181.889 FPGA.H4@142.67,181.43
DATA1.BUS12: FPGA.H3 MEM2_DATA.26 | length 40
  Top Layer w0.1: v1(141.47,181.83) FPGA.H3@141.87,181.43
  layer 3 w0.1: MEM2_DATA.26@124.841,207.01 126.898,209.067 131.804,209.067 134.62,206.251 134.62,201.371 141.712,194.279 141.712,187.889 141.884,187.717 141.884,182.245 v1(141.47,181.83)
DATA1.BUS13: FPGA.L7 MEM2_DATA.28 | length 44.2
  Top Layer w0.1: v1(144.678,178.638) FPGA.L7@145.07,179.03
  layer 3 w0.1: MEM2_DATA.28@127.381,207.01 128.575,205.816 128.575,180.848 129.04,180.383 138.819,180.383 140.183,179.019 144.298,179.019 v1(144.678,178.638)
DATA1.BUS14: FPGA.K6 MEM2_DATA.30 | length 40.4
  Top Layer w0.1: v1(143.866,179.426) FPGA.K6@144.27,179.83
  layer 3 w0.1: MEM2_DATA.30@129.921,207.01 131.145,205.786 131.145,181.148 131.674,180.619 142.672,180.619 v1(143.866,179.426)
DATA1.BUS15: FPGA.G3 MEM2_DATA.32 | length 28.7
  Top Layer w0.1: v1(141.474,182.626) FPGA.G3@141.87,182.23
  layer 3 w0.1: MEM2_DATA.32@132.461,207.01 133.807,205.664 133.807,199.314 141.04,192.081 141.04,183.06 v1(141.474,182.626)
DATA1.ENABLE: FPGA.F2 MEM2_CTRL.8 | length 29
  Top Layer w0.1: v1(132.309,183.439) 140.661,183.439 FPGA.F2@141.07,183.03
  Bottom Layer w0.1: MEM2_CTRL.8@120.269,174.625 123.546,177.902 123.546,184.099 123.749,184.302 131.445,184.302 v1(132.309,183.439)
DATA1.LB: FPGA.J7 MEM2_CTRL.4 | length 25.2
  Top Layer w0.1: v1(144.678,180.238) FPGA.J7@145.07,180.63
  Layer 2 w0.1: MEM2_CTRL.4@120.269,179.705 120.802,180.238 v1(144.678,180.238)
DATA1.UB: FPGA.G1 MEM2_CTRL.2 | length 20
  Top Layer w0.1: MEM2_CTRL.2@120.269,182.245 130.251,182.245 130.266,182.23 FPGA.G1@140.27,182.23
DATA1.WRITE: FPGA.J6 MEM2_CTRL.6 | length 28.4
  Top Layer w0.1: v1(143.866,181.026) 143.874,181.026 FPGA.J6@144.27,180.63
  layer 5 w0.1: MEM2_CTRL.6@120.269,177.165 122.479,179.375 137.389,179.375 139.294,177.47 141.63,177.47 141.859,177.698 141.859,178.003 142.114,178.258 142.644,178.258 142.723,178.337 142.723,179.654 143.866,180.797 v1(143.866,181.026)
DATA2: EBI_DATA.28 MCU.C3 | length 67.1
  Top Layer w0.1: v1(138.608,124.562) 138.621,124.562 MCU.C3@139.029,124.154
  Layer 2 w0.1: v1(97.968,125.425) 102.393,125.425 102.718,125.75 130.307,125.75 131.063,124.993 138.176,124.993 v1(138.608,124.562)
  layer 3 w0.1: EBI_DATA.28@80.137,143.256 v1(97.968,125.425)
DATA3: EBI_DATA.26 MCU.B3 | length 63.9
  Top Layer w0.1: v1(138.633,125.349) MCU.B3@139.029,124.954
  Layer 2 w0.1: v1(99.983,125.95) 138.032,125.95 v1(138.633,125.349)
  layer 3 w0.1: EBI_DATA.26@82.677,143.256 v1(99.983,125.95)
DATA4: EBI_DATA.24 MCU.A3 | length 63.1
  Top Layer w0.1: v1(138.633,126.162) 139.029,125.766 MCU.A3@139.029,125.754
  Layer 2 w0.1: EBI_DATA.24@85.217,143.256 95.555,132.918 135.382,132.918 138.633,129.667 v1(138.633,126.162)
DATA5: EBI_DATA.22 MCU.B2 | length 58.9
  Top Layer w0.1: v1(137.82,125.349) 137.834,125.349 MCU.B2@138.229,124.954
  Layer 2 w0.1: EBI_DATA.22@87.757,143.256 89.484,141.529 v1(123.012,141.529)
  layer 3 w0.1: v1(123.012,141.529) 137.82,126.721 v1(137.82,125.349)
DATA6: EBI_DATA.20 MCU.A2 | length 56.1
  Top Layer w0.1: v1(137.82,127.711) 138.229,127.303 MCU.A2@138.229,125.754
  Layer 2 w0.1: EBI_DATA.20@90.297,143.256 91.618,141.935 v1(123.596,141.935)
  layer 3 w0.1: v1(123.596,141.935) v1(137.82,127.711)
DATA7: EBI_DATA.18 MCU.A1 | length 53.6
  Top Layer w0.1: v1(137.033,126.568) 137.429,126.172 MCU.A1@137.429,125.754
  layer 5 w0.1: EBI_DATA.18@92.837,143.256 93.751,144.17 104.038,144.17 104.623,143.586 104.623,142.215 107.645,139.192 116.764,139.192 129.388,126.568 v1(137.033,126.568)
DATA8: EBI_DATA.16 MCU.B1 | length 49.6
  Top Layer w0.1: v1(137.033,125.349) MCU.B1@137.429,124.954
  layer 3 w0.1: EBI_DATA.16@95.377,143.256 102.311,136.322 126.06,136.322 v1(137.033,125.349)
DATA9: EBI_DATA.14 MCU.C2 | length 49.1
  Top Layer w0.1: v1(137.82,124.562) MCU.C2@138.229,124.154
  layer 3 w0.1: EBI_DATA.14@97.917,143.256 104.394,136.779 127.102,136.779 136.677,127.203 136.677,126.213 137.414,125.476 137.414,124.968 v1(137.82,124.562)
DATA10: EBI_DATA.12 MCU.C1 | length 53.9
  Top Layer w0.1: EBI_DATA.12@100.457,143.256 100.457,127.889 v1(102.946,125.4) ; v1(137.033,124.562) 137.033,124.55 MCU.C1@137.429,124.154
  Layer 2 w0.1: v1(102.946,125.4) 130.355,125.4 131.193,124.562 v1(137.033,124.562)
DATA11: EBI_DATA.10 MCU.D2 | length 43.9
  Top Layer w0.1: v1(137.846,123.749) 138.049,123.546 138.229,123.546 MCU.D2@138.229,123.354
  layer 5 w0.1: EBI_DATA.10@102.997,143.256 116.484,129.769 125.044,129.769 131.42,123.393 137.566,123.393 137.846,123.673 v1(137.846,123.749)
DATA12: EBI_DATA.8 MCU.D1 | length 42.4
  Top Layer w0.1: v1(137.033,123.749) MCU.D1@137.429,123.354
  layer 5 w0.1: EBI_DATA.8@105.537,143.256 107.899,140.894 116.992,140.894 129.026,128.86 135.274,128.86 137.383,126.752 137.383,124.099 v1(137.033,123.749)
DATA13: EBI_DATA.6 MCU.E3 | length 41.3
  Top Layer w0.1: v1(138.622,122.961) MCU.E3@139.029,122.554
  layer 5 w0.1: EBI_DATA.6@108.077,143.256 109.576,141.757 122.149,141.757 134.395,129.511 135.179,129.511 138.252,126.438 138.252,123.331 v1(138.622,122.961)
DATA14: EBI_DATA.4 MCU.E2 | length 45.7
  Top Layer w0.1: v1(137.82,122.961) MCU.E2@138.229,122.554
  layer 5 w0.1: EBI_DATA.4@110.617,143.256 111.582,142.291 125.78,142.291 141.432,126.639 141.432,123.17 140.868,122.606 138.176,122.606 v1(137.82,122.961)
DATA15: EBI_DATA.2 MCU.E1 | length 49.4
  Top Layer w0.1: EBI_DATA.2@113.157,143.256 114.656,144.755 138.328,144.755 138.836,144.247 138.836,130.15 136.677,127.991 136.677,123.306 MCU.E1@137.429,122.554
E/D: FPGA_CLK.1
EBI.HSNC: MCU.K5
EBI.REN: EBI_address.2 MCU.C6 | length 76.9
  Top Layer w0.1: v1(141.021,124.562) MCU.C6@141.429,124.154
  Layer 2 w0.1: v1(141.021,124.562) 142.133,125.674 142.133,134.919 149.682,142.469 149.682,143.561 150.368,144.247 181.296,144.247 182.372,143.17 182.372,142.646 182.989,142.029 200.322,142.029 EBI_address.2@201.422,143.129
EBI.WE: EBI_address.4 MCU.B6 | length 66.8
  Top Layer w0.1: v1(141.021,125.349) 141.034,125.349 MCU.B6@141.429,124.954
  layer 4 w0.1: v1(141.021,125.349) 142.215,124.155 163.322,124.155 167.538,128.372 184.125,128.372 EBI_address.4@198.882,143.129
FPGA.A00: EBI_address.59 FPGA.P8 | length 39.1
  Top Layer w0.1: v1(145.465,176.226) FPGA.P8@145.87,176.63
  layer 4 w0.1: EBI_address.59@127.762,145.669 146.177,164.084 146.177,175.514 v1(145.465,176.226)
FPGA.A01: EBI_address.57 FPGA.N7 | length 44.2
  Top Layer w0.1: v1(144.678,177.038) FPGA.N7@145.07,177.43
  layer 4 w0.1: EBI_address.57@130.302,145.669 129.388,144.755 127.178,144.755 126.848,145.085 126.848,148.387 145.059,166.599 145.059,176.657 v1(144.678,177.038)
FPGA.A02: EBI_address.55 FPGA.V7 | length 35.3
  Top Layer w0.1: EBI_address.55@132.842,145.669 140.382,153.209 144.659,153.209 145.07,153.619 FPGA.V7@145.07,173.43
FPGA.A03: EBI_address.53 FPGA.U7 | length 32.6
  Top Layer w0.1: v1(144.678,173.838) FPGA.U7@145.07,174.23
  layer 3 w0.1: EBI_address.53@135.382,145.669 144.678,154.965 v1(144.678,173.838)
FPGA.A04: EBI_address.51 FPGA.V8 | length 35.9
  Top Layer w0.1: EBI_address.51@137.922,145.669 138.836,144.755 143.891,144.755 144.442,145.306 144.442,148.963 145.87,150.391 145.87,170.439 145.82,170.489 145.82,173.38 FPGA.V8@145.87,173.43
FPGA.A05: EBI_address.49 FPGA.U8 | length 30.8
  Top Layer w0.1: EBI_address.49@140.462,145.669 145.415,150.622 145.415,173.775 FPGA.U8@145.87,174.23
FPGA.A06: EBI_address.47 FPGA.N8 | length 33
  Top Layer w0.1: v1(145.364,177.038) 145.478,177.038 FPGA.N8@145.87,177.43
  layer 3 w0.1: EBI_address.47@143.002,145.669 145.034,147.701 145.034,176.708 v1(145.364,177.038)
FPGA.A07: EBI_address.45 FPGA.M8 | length 49.5
  Top Layer w0.1: v1(145.39,177.8) 145.44,177.8 FPGA.M8@145.87,178.23
  Bottom Layer w0.1: v1(145.39,177.8) 145.11,178.079 145.11,182.067 145.263,182.22 150.673,182.22 150.698,182.194 150.698,173.388 150.921,173.165 150.921,163.774 145.542,158.394 EBI_address.45@145.542,145.669
FPGA.A08: EBI_address.43 FPGA.V9 | length 28.6
  Top Layer w0.1: FPGA.V9@146.67,173.43 146.42,173.18 146.42,147.331 EBI_address.43@148.082,145.669
FPGA.A09: EBI_address.41 FPGA.T9 | length 37.2
  Top Layer w0.1: FPGA.T9@146.67,175.03 146.202,174.562 146.202,149.16 144.642,147.599 144.642,145.197 145.085,144.755 149.708,144.755 EBI_address.41@150.622,145.669
FPGA.A10: EBI_address.39 FPGA.T8 | length 32.7
  Top Layer w0.1: v1(145.466,174.625) FPGA.T8@145.87,175.03
  layer 3 w0.1: v1(145.466,174.625) 145.466,153.365 EBI_address.39@153.162,145.669
FPGA.A11: EBI_address.37 FPGA.R8 | length 34.6
  Top Layer w0.1: v1(145.472,175.432) FPGA.R8@145.87,175.83
  layer 3 w0.1: v1(145.472,175.432) 146.6,174.304 146.6,172.648 147.142,172.105 147.142,154.229 EBI_address.37@155.702,145.669
FPGA.A12: EBI_address.35 FPGA.V10 | length 32.2
  Top Layer w0.1: FPGA.V10@147.47,173.43 147.47,172.612 v1(148.082,172)
  layer 3 w0.1: v1(148.082,172) 148.082,157.15 158.242,146.99 EBI_address.35@158.242,145.669
FPGA.A13: EBI_address.33 FPGA.U10 | length 34.8
  Top Layer w0.1: v1(147.117,173.025) 147.14,173.048 147.14,173.567 147.333,173.76 147.37,173.76 147.47,173.86 FPGA.U10@147.47,174.23
  layer 3 w0.1: v1(147.117,173.025) 147.588,172.553 148.294,172.553 148.432,172.415 148.432,158.019 EBI_address.33@160.782,145.669
FPGA.A14: EBI_address.31 FPGA.T10 | length 37.2
  Top Layer w0.1: v1(146.77,170.8) 146.98,170.8 147.142,170.637 147.142,168.326 146.787,167.97 v1(146.787,164.236) ; v1(147.06,174.74) 147.35,175.03 FPGA.T10@147.47,175.03
  layer 5 w0.1: v1(146.787,164.236) 161.823,149.2 161.823,147.168 EBI_address.31@163.322,145.669
  Bottom Layer w0.1: v1(146.77,170.8) 146.767,170.803 146.767,173.17 147.164,173.567 147.164,173.599 147.3,173.735 147.3,174.025 147.06,174.265 v1(147.06,174.74)
FPGA.A15: EBI_address.29 FPGA.R10 | length 38
  Top Layer w0.1: FPGA.R10@147.47,175.83 v1(147.879,175.421)
  layer 3 w0.1: v1(147.879,175.421) 148.3,175 148.3,173.417 148.632,173.085 148.632,162.549 155.367,155.814 155.717,155.814 EBI_address.29@165.862,145.669
FPGA.A16: EBI_address.27 FPGA.V11 | length 36.1
  Top Layer w0.1: FPGA.V11@148.27,173.43 148.27,173.013 149.213,172.07 v1(149.213,164.858)
  layer 3 w0.1: v1(149.213,164.858) EBI_address.27@168.402,145.669
FPGA.A17: EBI_address.25 FPGA.U11 | length 50.6
  Top Layer w0.1: FPGA.U11@148.27,174.23 148.27,173.898 147.803,173.43 147.803,173.025 148.641,172.187 v1(148.641,147.015)
  Layer 2 w0.1: v1(148.641,147.015) 169.596,147.015 EBI_address.25@170.942,145.669
FPGA.A18: EBI_address.23 FPGA.N9 | length 51.6
  Top Layer w0.1: FPGA.N9@146.67,177.43 146.329,177.089 146.329,175.666 146.507,175.489 v1(147.066,175.489)
  layer 3 w0.1: v1(147.066,175.489) 146.71,175.844 146.71,176.378 146.914,176.581 148.78,176.581 149.042,176.319 149.042,176.018 150.085,174.975 150.411,174.975 150.616,174.77 150.616,174.604 150.951,174.269 153.213,174.269 154.153,173.33 159.385,173.33 159.995,172.72 159.995,163.322 173.482,149.835 EBI_address.23@173.482,145.669